# EAGLE board SparkFun_ZED-F9R_v11-Panel (EAGLE 9.6.2), part 1 of 2
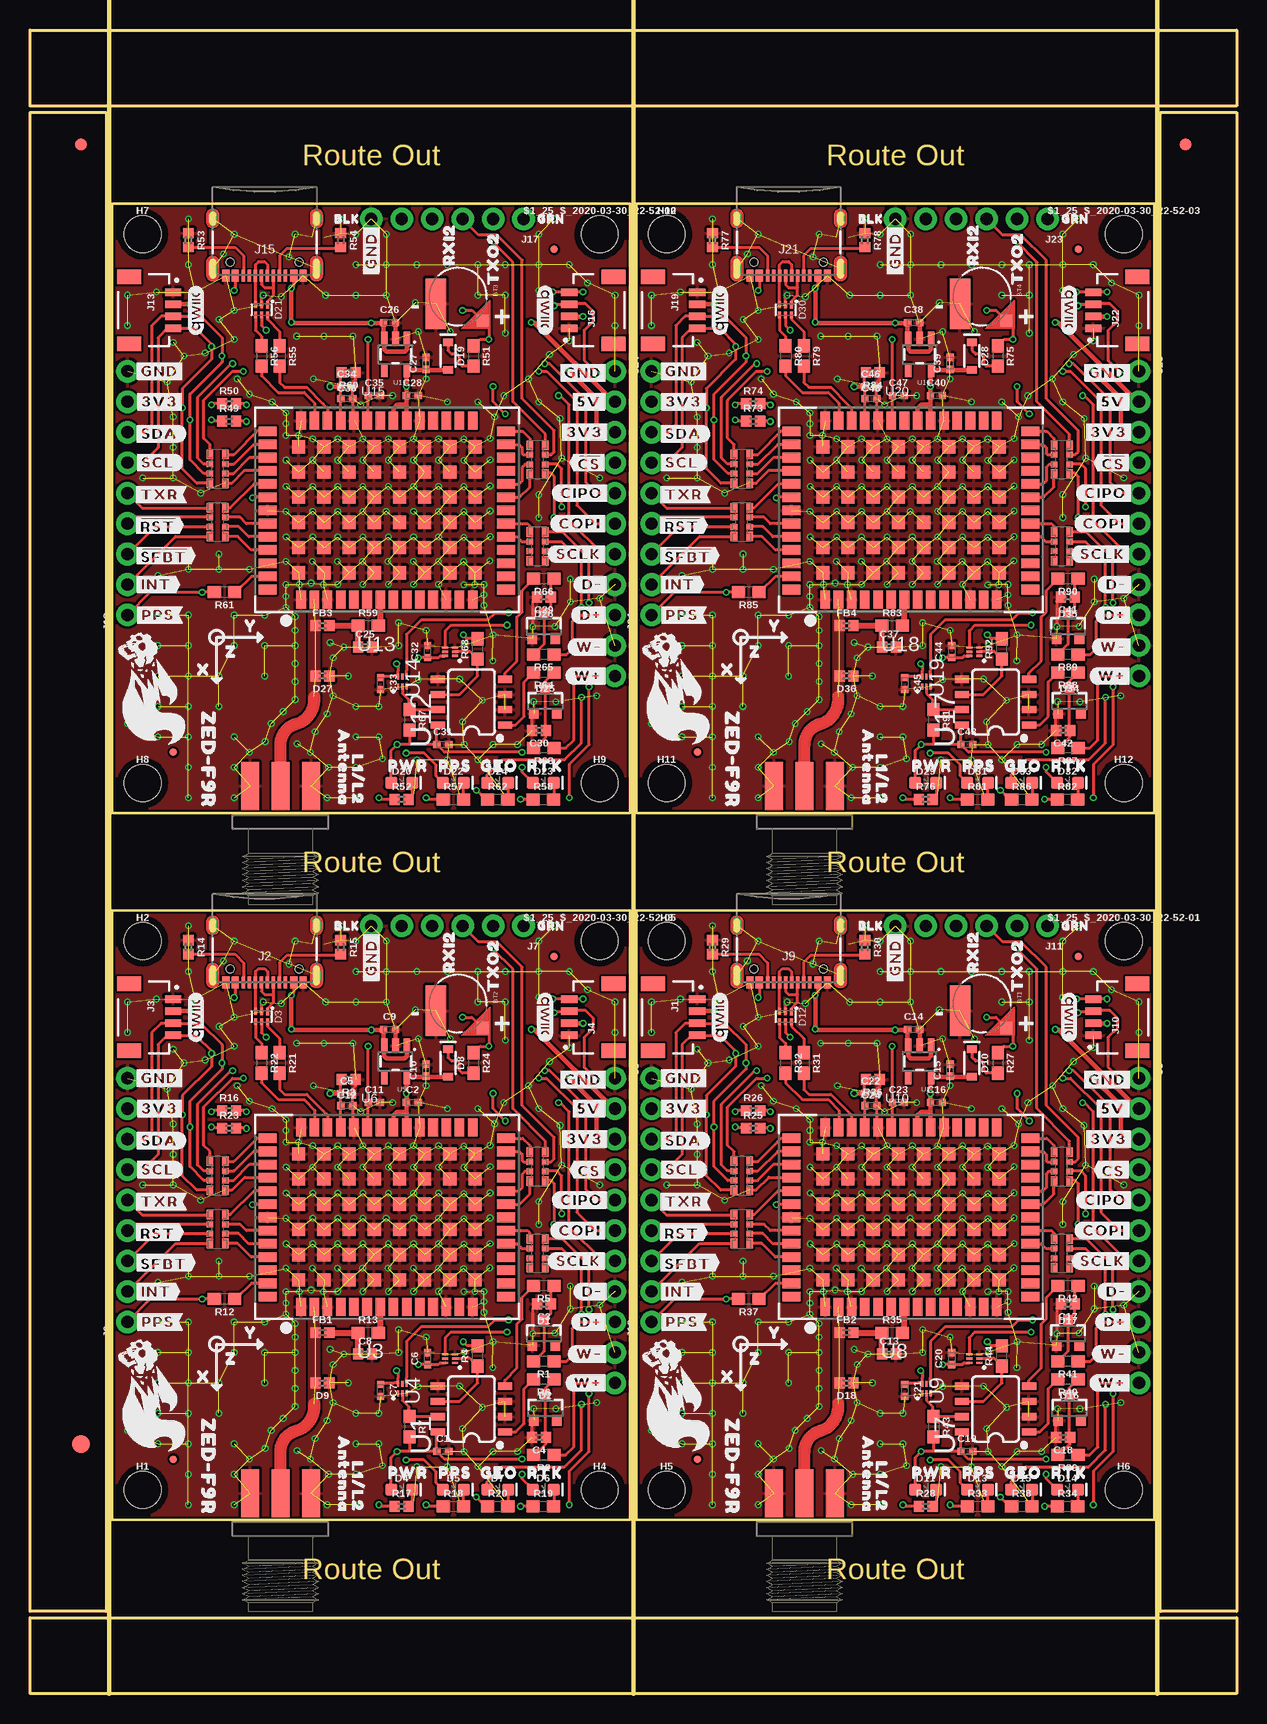
[diagram p0: board, top side]
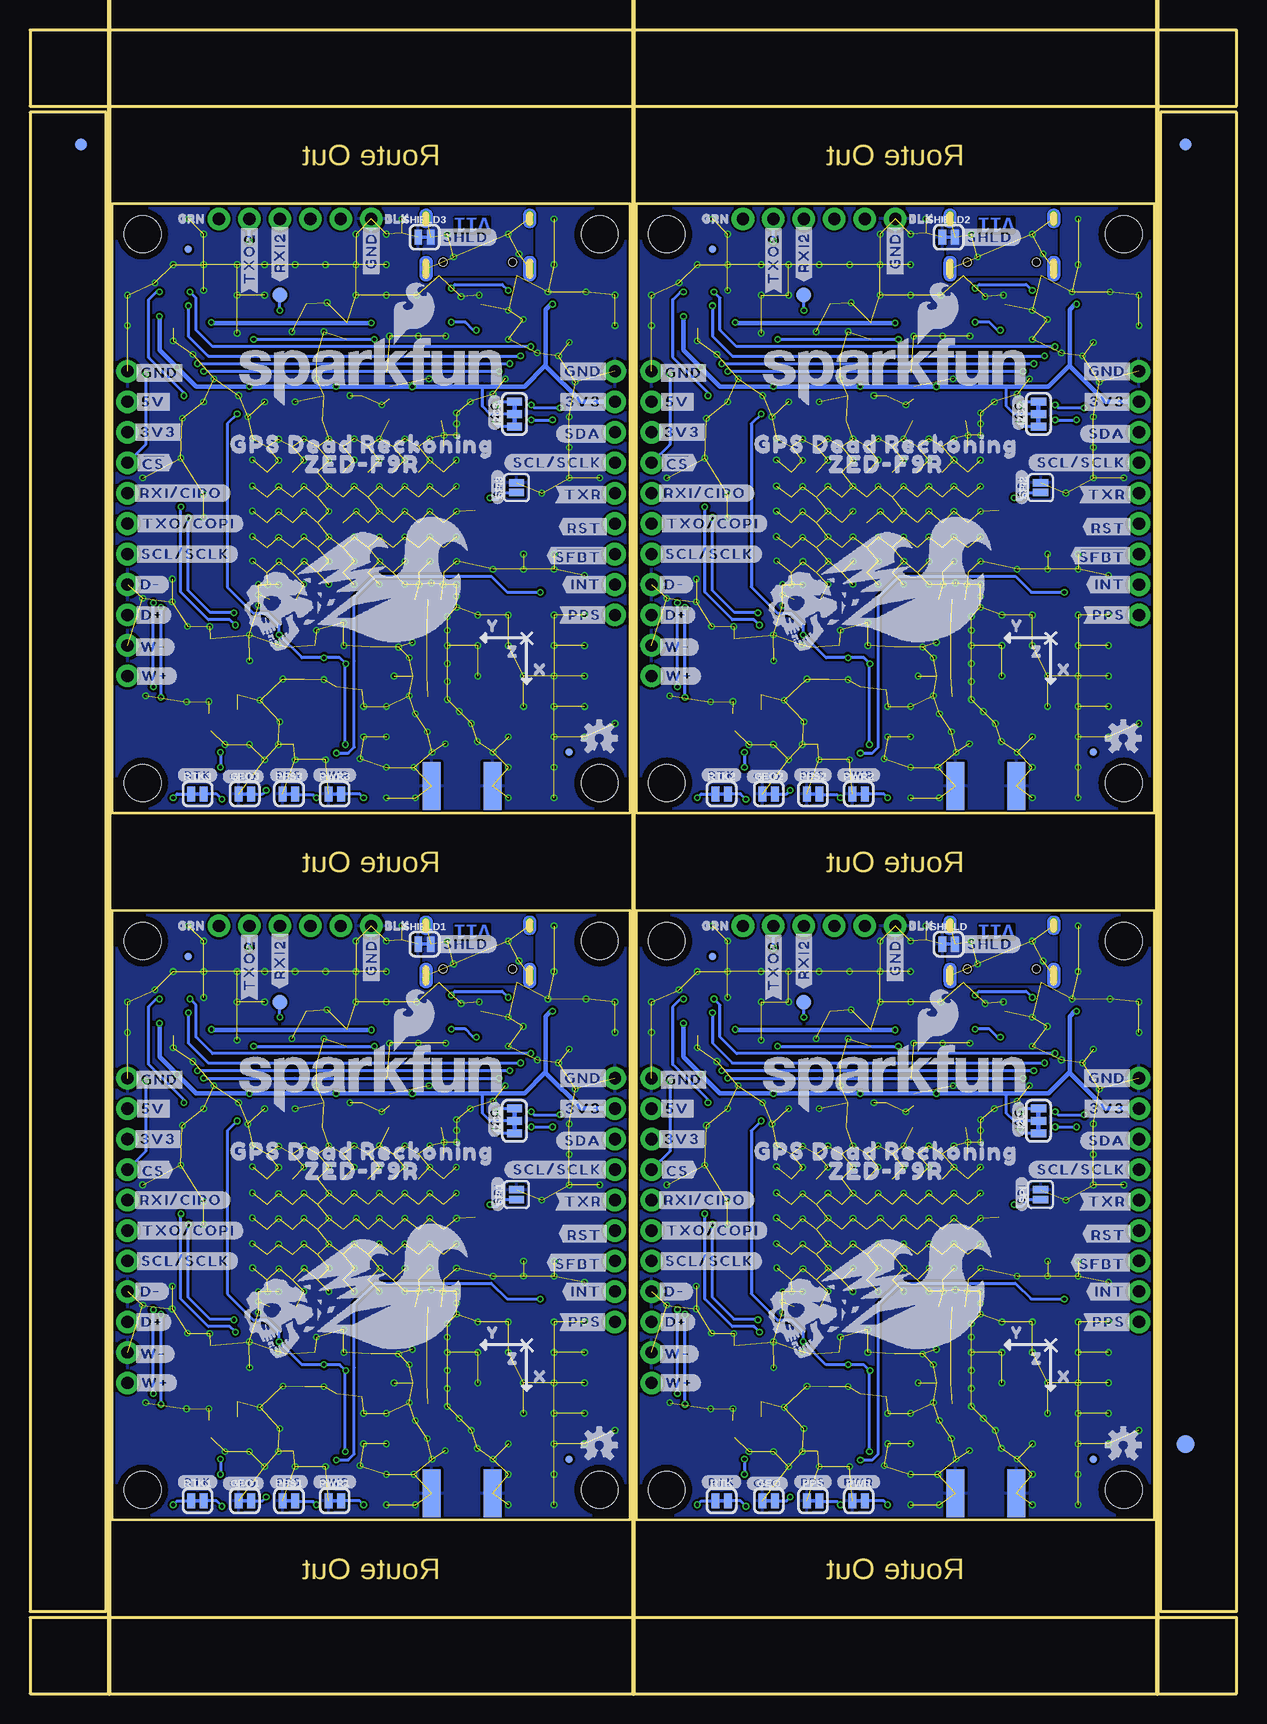
[diagram p1: board, bottom side, seen from below]

Size 100.58 x 138.68 mm. Coordinates in mm from the lower left corner, seen from the top.
Outline: 6.86,14.48 6.86,65.28 50.04,65.28 50.04,14.48 6.86,14.48
Outline: 50.55,14.48 50.55,65.28 93.73,65.28 93.73,14.48 50.55,14.48
Outline: 6.86,73.41 6.86,124.21 50.04,124.21 50.04,73.41 6.86,73.41
Outline: 50.55,73.41 50.55,124.21 93.73,124.21 93.73,73.41 50.55,73.41
Outline: 0,6.35 100.58,6.35 100.58,0 0,0 0,6.35
Outline: 94.23,131.83 100.58,131.83 100.58,6.86 94.23,6.86 94.23,131.83
Outline: 0,138.68 100.58,138.68 100.58,132.33 0,132.33 0,138.68
Outline: 0,131.83 6.35,131.83 6.35,6.86 0,6.86 0,131.83
Copper layers (1*16): Top 0.035mm / dielectric 1.5mm / Bottom 0.035mm
Design rules "SparkFun_ZED-F9R_v11": minimum track width 5mil, minimum drill 0.3mm, track to track 5mil, track to pad 5mil, pad to pad 5mil, via to via 5mil, smd to smd 5mil, copper to edge 7mil, drill to drill 7mil, minimum pad ring 5mil, minimum via ring 5mil, stop-mask expansion 2.5mil, vias tented up to drill 25mil, thermal gap 10mil
Net classes: 1 Antenna: width 1 mm, clearance 0.3 mm
Milling: 3 lines

## Footprints (pad centres in the part's own frame; a part is rotated, then mirrored left to right if it is on the bottom)
STAND-OFF-TIGHT = hole 3.048: 0,0
MS421R_IV03E = smd 1 x 1: + 2.022,2.032 | smd 4.2 x 1.7: - 0.6,-1.85
0402-TIGHT = smd 0.6 x 0.6: 1 -0.5,0; 2 0.5,0
0402 = smd 0.85 x 0.9: 1 -0.58,0; 2 0.58,0
SOT23-3 = smd 0.8 x 0.9: 1 -0.95,-1; 2 0.95,-1; 3 0,1.1
SOT886 = smd 0.61 x 0.25: 1 -0.405,0.5 | smd 0.56 x 0.25: 2 -0.43,0; 3 -0.43,-0.5; 4 0.43,-0.5; 5 0.43,0; 6 0.43,0.5
LED-0603 = smd 1 x 1: A -0.877,0; C 0.877,0
SOD-323 = smd 0.63 x 0.83: A 1.15,0; C -1.15,0
SMA-EDGE = smd 1.5 x 4: GND@0 -2.54,0; GND@1 2.54,0; SIG 0,0 | smd 1.5 x 4 bottom: GND@2 -2.54,0; GND@3 2.54,0
FIDUCIAL-1X2 = smd 1 x 1: 1 0,0
FIDUCIAL-1.5X3 = smd 1.5 x 1.5: 1 0,0
FIDUCIAL-MICRO = smd 0.635 x 0.635: 1 0,0
SMT-JUMPER_2_NC_TRACE_SILK = smd 0.66 x 1.27: 1 -0.521,0; 2 0.521,0
SMT-JUMPER_3_2-NC_TRACE_SILK = smd 0.66 x 1.27: 1 -1.041,0; 2 0,0; 3 1.041,0
JST04_1MM_RA = smd 0.6 x 1.35: 1 -1.5,0; 2 -0.5,0; 3 0.5,0; 4 1.5,0 | smd 1.2 x 2: NC1 2.8,-3.675; NC2 -2.8,-3.675
USB-C-16P-2LAYER-PADS = smd 0.3 x 1: A5 -1.25,-0.34; A6 -0.25,-0.34; A7 0.25,-0.34; A8 1.25,-0.34; B5 1.75,-0.34; B6 0.75,-0.34; B7 -0.75,-0.34; B8 -1.75,-0.34 | smd 0.6 x 1: GND -3.225,-0.34; GND2 3.225,-0.34; VBUS1 -2.45,-0.34; VBUS2 2.45,-0.34 | drill 0.4 pad 0.6 long: SHLD1 -4.318,-0.915; SHLD2 4.318,-0.915; SHLD3 -4.318,-5.095; SHLD4 4.318,-5.095 | hole 0.65: -2.89,-1.445; 2.89,-1.445
1X11_NO_SILK = drill 1.016 pad 1.88: 1 0,0; 2 2.54,0; 3 5.08,0; 4 7.62,0; 5 10.16,0; 6 12.7,0; 7 15.24,0; 8 17.78,0; 9 20.32,0; 10 22.86,0; 11 25.4,0
1X09_NO_SILK = drill 1.016 pad 1.88: 1 0,0; 2 2.54,0; 3 5.08,0; 4 7.62,0; 5 10.16,0; 6 12.7,0; 7 15.24,0; 8 17.78,0; 9 20.32,0
1X06_NO_SILK = drill 1.016 pad 1.88: 1 0,0; 2 2.54,0; 3 5.08,0; 4 7.62,0; 5 10.16,0; 6 12.7,0
0603 = smd 1.1 x 1: 1 -0.85,0; 2 0.85,0
1206_RA = smd 0.8 x 0.55: P1 -1.2,-0.62; P4 1.2,-0.62; P5 1.2,0.68; P8 -1.2,0.68 | smd 0.5 x 0.55: P2 -0.4,-0.62; P3 0.4,-0.62; P6 0.4,0.68; P7 -0.4,0.68
SMT-JUMPER_2_NO_SILK = smd 0.635 x 1.27: 1 -0.406,0; 2 0.406,0
PAD.03X.05 = smd 1.27 x 1.27: 1 0,0
SO08 = smd 0.6 x 1.2: 1 -1.905,-2.8; 2 -0.635,-2.8; 3 0.635,-2.8; 4 1.905,-2.8; 5 1.905,2.8; 6 0.635,2.8; 7 -0.635,2.8; 8 -1.905,2.8
SOT23-5 = smd 0.55 x 1.2: 1 -0.95,-1.3; 2 0,-1.3; 3 0.95,-1.3; 4 0.95,1.3; 5 -0.95,1.3
SIP6_MICROPAK2 = smd 0.19 x 0.5: P1 -0.36,-0.4; P2 -0.01,-0.4; P3 0.34,-0.4; P4 0.34,0.43; P5 -0.01,0.43; P6 -0.36,0.43
UBLOX_ZED_F9R = smd 1.1 x 1.1: G1 -7.312,-5.37; G2 -5.212,-5.37; G3 -3.112,-5.37; G4 -1.012,-5.37; G5 1.088,-5.37; G6 3.188,-5.37; G7 5.288,-5.37; G8 7.388,-5.37; G9 7.388,-3.27; G10 5.288,-3.27; G11 3.188,-3.27; G12 1.088,-3.27; G13 -1.012,-3.27; G14 -3.112,-3.27; G15 -5.212,-3.27; G16 -7.312,-3.27; G17 -7.312,-1.17; G18 -5.212,-1.17; G19 -3.112,-1.17; G20 -1.012,-1.17; G21 1.088,-1.17; G22 3.188,-1.17; G23 5.288,-1.17; G24 7.388,-1.17; G25 7.388,0.93; G26 5.288,0.93; G27 3.188,0.93; G28 1.088,0.93; G29 -1.012,0.93; G30 -3.112,0.93; G31 -5.212,0.93; G32 -7.312,0.93; G33 -7.312,3.03; G34 -5.212,3.03; G35 -3.112,3.03; G36 -1.012,3.03; G37 1.088,3.03; G38 3.188,3.03; G39 5.288,3.03; G40 7.388,3.03; G41 7.388,5.13; G42 5.288,5.13; G43 3.188,5.13; G44 1.088,5.13; G45 -1.012,5.13; G46 -3.112,5.13; G47 -5.212,5.13; G48 -7.312,5.13 | smd 0.8 x 1.5: P1 -7.112,-7.62; P2 -6.012,-7.62; P3 -4.912,-7.62; P4 -3.812,-7.62; P5 -2.712,-7.62; P6 -1.612,-7.62; P7 -0.512,-7.62; P8 0.588,-7.62; P9 1.688,-7.62; P10 2.788,-7.62; P11 3.888,-7.62; P12 4.988,-7.62; P13 6.088,-7.62; P14 7.188,-7.62; P28 7.188,7.33; P29 6.088,7.33; P30 4.988,7.33; P31 3.888,7.33; P32 2.788,7.33; P33 1.688,7.33; P34 0.588,7.33; P35 -0.512,7.33; P36 -1.612,7.33; P37 -2.712,7.33; P38 -3.812,7.33; P39 -4.912,7.33; P40 -6.012,7.33; P41 -7.112,7.33 | smd 1.5 x 0.8: P15 9.988,-6.77; P16 9.988,-5.67; P17 9.988,-4.57; P18 9.988,-3.47; P19 9.988,-2.37; P20 9.988,-1.27; P21 9.988,-0.17; P22 9.988,0.93; P23 9.988,2.03; P24 9.988,3.13; P25 9.988,4.23; P26 9.988,5.33; P27 9.988,6.43; P42 -9.912,6.43; P43 -9.912,5.33; P44 -9.912,4.23; P45 -9.912,3.13; P46 -9.912,2.03; P47 -9.912,0.93; P48 -9.912,-0.17; P49 -9.912,-1.27; P50 -9.912,-2.37; P51 -9.912,-3.47; P52 -9.912,-4.57; P53 -9.912,-5.67; P54 -9.912,-6.77

## Placement (x,y rotation side)
$1_25_$_2020-03-30_22-52-01  STAND-OFFTIGHT  [STAND-OFF-TIGHT]  91.19,62.74 0 top
$1_25_$_2020-03-30_22-52-02  STAND-OFFTIGHT  [STAND-OFF-TIGHT]  47.5,121.67 0 top
$1_25_$_2020-03-30_22-52-03  STAND-OFFTIGHT  [STAND-OFF-TIGHT]  91.19,121.67 0 top
$1_25_$_2020-03-30_22-52-05  STAND-OFFTIGHT  [STAND-OFF-TIGHT]  47.5,62.74 0 top
BT1  RELOWABLE_BATTERY_MS421R  [MS421R_IV03E]  79.38,57.53 270 top
BT2  RELOWABLE_BATTERY_MS421R  [MS421R_IV03E]  35.69,57.53 270 top
BT3  RELOWABLE_BATTERY_MS421R  [MS421R_IV03E]  35.69,116.46 270 top
BT4  RELOWABLE_BATTERY_MS421R  [MS421R_IV03E]  79.38,116.46 270 top
C1  0.1uF  [0402-TIGHT]  34.42,20.19 0 top
C2  1.0uF  [0402-TIGHT]  31.88,49.28 0 top
C3  1nF  [0402]  42.84,32.49 180 top
C4  1nF  [0402]  42.43,21.37 180 top
C5  0.1uF  [0402-TIGHT]  26.39,50.01 0 top
C6  0.1uF  [0402-TIGHT]  33.15,27.94 90 top
C7  0.1uF  [0402-TIGHT]  29.24,25.28 270 top
C8  47pF  [0402]  27.94,28.32 0 top
C9  1.0uF  [0402-TIGHT]  29.97,55.37 0 top
C10  1.0uF  [0402-TIGHT]  33.02,51.97 90 top
C11  2.2uF  [0402-TIGHT]  28.7,49.28 0 top
C12  0.1uF  [0402-TIGHT]  26.42,49.02 0 top
C13  47pF  [0402]  71.63,28.32 0 top
C14  1.0uF  [0402-TIGHT]  73.66,55.37 0 top
C15  1.0uF  [0402-TIGHT]  76.71,51.97 90 top
C16  1.0uF  [0402-TIGHT]  75.56,49.28 0 top
C17  1nF  [0402]  86.53,32.49 180 top
C18  1nF  [0402]  86.12,21.37 180 top
C19  0.1uF  [0402-TIGHT]  78.11,20.19 0 top
C20  0.1uF  [0402-TIGHT]  76.84,27.94 90 top
C21  0.1uF  [0402-TIGHT]  72.92,25.28 270 top
C22  0.1uF  [0402-TIGHT]  70.08,50.01 0 top
C23  2.2uF  [0402-TIGHT]  72.39,49.28 0 top
C24  0.1uF  [0402-TIGHT]  70.1,49.02 0 top
C25  47pF  [0402]  27.94,87.25 0 top
C26  1.0uF  [0402-TIGHT]  29.97,114.3 0 top
C27  1.0uF  [0402-TIGHT]  33.02,110.9 90 top
C28  1.0uF  [0402-TIGHT]  31.88,108.2 0 top
C29  1nF  [0402]  42.84,91.42 180 top
C30  1nF  [0402]  42.43,80.3 180 top
C31  0.1uF  [0402-TIGHT]  34.42,79.12 0 top
C32  0.1uF  [0402-TIGHT]  33.15,86.87 90 top
C33  0.1uF  [0402-TIGHT]  29.24,84.21 270 top
C34  0.1uF  [0402-TIGHT]  26.39,108.94 0 top
C35  2.2uF  [0402-TIGHT]  28.7,108.2 0 top
C36  0.1uF  [0402-TIGHT]  26.42,107.95 0 top
C37  47pF  [0402]  71.63,87.25 0 top
C38  1.0uF  [0402-TIGHT]  73.66,114.3 0 top
C39  1.0uF  [0402-TIGHT]  76.71,110.9 90 top
C40  1.0uF  [0402-TIGHT]  75.56,108.2 0 top
C41  1nF  [0402]  86.53,91.42 180 top
C42  1nF  [0402]  86.12,80.3 180 top
C43  0.1uF  [0402-TIGHT]  78.11,79.12 0 top
C44  0.1uF  [0402-TIGHT]  76.84,86.87 90 top
C45  0.1uF  [0402-TIGHT]  72.92,84.21 270 top
C46  0.1uF  [0402-TIGHT]  70.08,108.94 0 top
C47  2.2uF  [0402-TIGHT]  72.39,108.2 0 top
C48  0.1uF  [0402-TIGHT]  70.1,107.95 0 top
D1  15V  [SOT23-3]  42.84,30.02 0 top
D2  15V  [SOT23-3]  42.97,23.79 0 top
D3  PRTR5V0U2F  [SOT886]  19.3,56.44 270 top
D4  RED  [LED-0603]  30.99,17.02 0 top
D5  BLUE  [LED-0603]  35.31,17.02 0 top
D6  BLUE  [LED-0603]  42.8,17.02 0 top
D7  BLUE  [LED-0603]  38.99,17.02 0 top
D8  0.5A/40V/420mV  [SOD-323]  34.85,52.58 270 top
D9  PESD0402-0402  [0402]  24.38,25.91 180 top
D10  0.5A/40V/420mV  [SOD-323]  78.54,52.58 270 top
D11  RED  [LED-0603]  74.68,17.02 0 top
D12  PRTR5V0U2F  [SOT886]  62.99,56.44 270 top
D13  BLUE  [LED-0603]  78.99,17.02 0 top
D14  BLUE  [LED-0603]  86.49,17.02 0 top
D15  BLUE  [LED-0603]  82.68,17.02 0 top
D16  15V  [SOT23-3]  86.65,23.79 0 top
D17  15V  [SOT23-3]  86.53,30.02 0 top
D18  PESD0402-0402  [0402]  68.07,25.91 180 top
D19  0.5A/40V/420mV  [SOD-323]  34.85,111.51 270 top
D20  RED  [LED-0603]  30.99,75.95 0 top
D21  PRTR5V0U2F  [SOT886]  19.3,115.37 270 top
D22  BLUE  [LED-0603]  35.31,75.95 0 top
D23  BLUE  [LED-0603]  42.8,75.95 0 top
D24  BLUE  [LED-0603]  38.99,75.95 0 top
D25  15V  [SOT23-3]  42.97,82.72 0 top
D26  15V  [SOT23-3]  42.84,88.95 0 top
D27  PESD0402-0402  [0402]  24.38,84.84 180 top
D28  0.5A/40V/420mV  [SOD-323]  78.54,111.51 270 top
D29  RED  [LED-0603]  74.68,75.95 0 top
D30  PRTR5V0U2F  [SOT886]  62.99,115.37 270 top
D31  BLUE  [LED-0603]  78.99,75.95 0 top
D32  BLUE  [LED-0603]  86.49,75.95 0 top
D33  BLUE  [LED-0603]  82.68,75.95 0 top
D34  15V  [SOT23-3]  86.65,82.72 0 top
D35  15V  [SOT23-3]  86.53,88.95 0 top
D36  PESD0402-0402  [0402]  68.07,84.84 180 top
E1  ANTENNA-SMA-GROUNDEDEDGE_SMA  [SMA-EDGE]  20.88,16.72 180 top
E2  ANTENNA-SMA-GROUNDEDEDGE_SMA  [SMA-EDGE]  64.57,16.72 180 top
E3  ANTENNA-SMA-GROUNDEDEDGE_SMA  [SMA-EDGE]  20.88,75.65 180 top
E4  ANTENNA-SMA-GROUNDEDEDGE_SMA  [SMA-EDGE]  64.57,75.65 180 top
E$1  [FIDUCIAL-1X2]  4.23,129.16 0 top
E$2  [FIDUCIAL-1X2]  4.23,129.16 0 bottom
E$3  [FIDUCIAL-1X2]  96.35,129.16 0 top
E$4  [FIDUCIAL-1X2]  96.35,129.16 0 bottom
E$5  [FIDUCIAL-1.5X3]  4.23,20.83 0 top
E$6  [FIDUCIAL-1.5X3]  4.23,20.83 0 bottom
FB1  120Ω  [0402]  24.38,30.1 0 top
FB2  120Ω  [0402]  68.07,30.1 0 top
FB3  120Ω  [0402]  24.38,89.03 0 top
FB4  120Ω  [0402]  68.07,89.03 0 top
FD1  FIDUCIALUFIDUCIAL  [FIDUCIAL-MICRO]  11.94,19.56 0 top
FD2  FIDUCIALUFIDUCIAL  [FIDUCIAL-MICRO]  11.94,19.56 0 bottom
FD3  FIDUCIALUFIDUCIAL  [FIDUCIAL-MICRO]  43.69,61.47 0 top
FD4  FIDUCIALUFIDUCIAL  [FIDUCIAL-MICRO]  43.69,61.47 0 bottom
FD5  FIDUCIALUFIDUCIAL  [FIDUCIAL-MICRO]  87.38,61.47 0 top
FD6  FIDUCIALUFIDUCIAL  [FIDUCIAL-MICRO]  55.63,19.56 0 bottom
FD7  FIDUCIALUFIDUCIAL  [FIDUCIAL-MICRO]  87.38,61.47 0 bottom
FD8  FIDUCIALUFIDUCIAL  [FIDUCIAL-MICRO]  55.63,19.56 0 top
FD9  FIDUCIALUFIDUCIAL  [FIDUCIAL-MICRO]  43.69,120.4 0 top
FD10  FIDUCIALUFIDUCIAL  [FIDUCIAL-MICRO]  11.94,78.49 0 bottom
FD11  FIDUCIALUFIDUCIAL  [FIDUCIAL-MICRO]  43.69,120.4 0 bottom
FD12  FIDUCIALUFIDUCIAL  [FIDUCIAL-MICRO]  11.94,78.49 0 top
FD13  FIDUCIALUFIDUCIAL  [FIDUCIAL-MICRO]  87.38,120.4 0 top
FD14  FIDUCIALUFIDUCIAL  [FIDUCIAL-MICRO]  55.63,78.49 0 bottom
FD15  FIDUCIALUFIDUCIAL  [FIDUCIAL-MICRO]  87.38,120.4 0 bottom
FD16  FIDUCIALUFIDUCIAL  [FIDUCIAL-MICRO]  55.63,78.49 0 top
GEO  JUMPER-SMT_2_NC_TRACE_SILK  [SMT-JUMPER_2_NC_TRACE_SILK]  38.99,16.08 0 bottom
GEO1  JUMPER-SMT_2_NC_TRACE_SILK  [SMT-JUMPER_2_NC_TRACE_SILK]  82.68,16.08 0 bottom
GEO2  JUMPER-SMT_2_NC_TRACE_SILK  [SMT-JUMPER_2_NC_TRACE_SILK]  38.99,75.01 0 bottom
GEO3  JUMPER-SMT_2_NC_TRACE_SILK  [SMT-JUMPER_2_NC_TRACE_SILK]  82.68,75.01 0 bottom
H1  STAND-OFFTIGHT  [STAND-OFF-TIGHT]  9.4,16.99 0 top
H2  STAND-OFFTIGHT  [STAND-OFF-TIGHT]  9.4,62.74 0 top
H3  STAND-OFFTIGHT  [STAND-OFF-TIGHT]  53.09,62.74 0 top
H4  STAND-OFFTIGHT  [STAND-OFF-TIGHT]  47.5,16.99 0 top
H5  STAND-OFFTIGHT  [STAND-OFF-TIGHT]  53.09,16.99 0 top
H6  STAND-OFFTIGHT  [STAND-OFF-TIGHT]  91.19,16.99 0 top
H7  STAND-OFFTIGHT  [STAND-OFF-TIGHT]  9.4,121.67 0 top
H8  STAND-OFFTIGHT  [STAND-OFF-TIGHT]  9.4,75.92 0 top
H9  STAND-OFFTIGHT  [STAND-OFF-TIGHT]  47.5,75.92 0 top
H10  STAND-OFFTIGHT  [STAND-OFF-TIGHT]  53.09,121.67 0 top
H11  STAND-OFFTIGHT  [STAND-OFF-TIGHT]  53.09,75.92 0 top
H12  STAND-OFFTIGHT  [STAND-OFF-TIGHT]  91.19,75.92 0 top
I2C  JUMPER-SMT_3_2-NC_TRACE_SILK  [SMT-JUMPER_3_2-NC_TRACE_SILK]  16.51,47.75 90 bottom
I2C1  JUMPER-SMT_3_2-NC_TRACE_SILK  [SMT-JUMPER_3_2-NC_TRACE_SILK]  60.2,47.75 90 bottom
I2C2  JUMPER-SMT_3_2-NC_TRACE_SILK  [SMT-JUMPER_3_2-NC_TRACE_SILK]  16.51,106.68 90 bottom
I2C3  JUMPER-SMT_3_2-NC_TRACE_SILK  [SMT-JUMPER_3_2-NC_TRACE_SILK]  60.2,106.68 90 bottom
J1  QWIIC_RIGHT_ANGLE  [JST04_1MM_RA]  55.63,56.39 270 top
J2  [USB-C-16P-2LAYER-PADS]  19.56,58.95 180 top
J3  QWIIC_RIGHT_ANGLE  [JST04_1MM_RA]  11.94,56.39 270 top
J4  QWIIC_RIGHT_ANGLE  [JST04_1MM_RA]  44.96,56.39 90 top
J5  [1X11_NO_SILK]  48.77,51.31 270 top
J6  [1X09_NO_SILK]  8.13,30.99 90 top
J7  [1X06_NO_SILK]  41.15,64.01 180 top
J8  [1X11_NO_SILK]  92.46,51.31 270 top
J9  [USB-C-16P-2LAYER-PADS]  63.25,58.95 180 top
J10  QWIIC_RIGHT_ANGLE  [JST04_1MM_RA]  88.65,56.39 90 top
J11  [1X06_NO_SILK]  84.84,64.01 180 top
J12  [1X09_NO_SILK]  51.82,30.99 90 top
J13  QWIIC_RIGHT_ANGLE  [JST04_1MM_RA]  11.94,115.32 270 top
J14  [1X11_NO_SILK]  48.77,110.24 270 top
J15  [USB-C-16P-2LAYER-PADS]  19.56,117.88 180 top
J16  QWIIC_RIGHT_ANGLE  [JST04_1MM_RA]  44.96,115.32 90 top
J17  [1X06_NO_SILK]  41.15,122.94 180 top
J18  [1X09_NO_SILK]  8.13,89.92 90 top
J19  QWIIC_RIGHT_ANGLE  [JST04_1MM_RA]  55.63,115.32 270 top
J20  [1X11_NO_SILK]  92.46,110.24 270 top
J21  [USB-C-16P-2LAYER-PADS]  63.25,117.88 180 top
J22  QWIIC_RIGHT_ANGLE  [JST04_1MM_RA]  88.65,115.32 90 top
J23  [1X06_NO_SILK]  84.84,122.94 180 top
J24  [1X09_NO_SILK]  51.82,89.92 90 top
LOGO1  OSHW-LOGOS  [OSHW-LOGO-S]  9.44,20.72 0 bottom
LOGO2  QWIIC_LOGO_4MM  [QWIIC_4MM]  42.93,56.39 270 top
LOGO3  SFE_LOGO_NAME_FLAME.2_INCH  [SFE_LOGO_NAME_FLAME_.2]  28.45,51.31 0 bottom
LOGO4  QWIIC_LOGO_4MM  [QWIIC_4MM]  13.84,56.39 90 top
LOGO5  SFE_LOGO_NAME_FLAME.2_INCH  [SFE_LOGO_NAME_FLAME_.2]  72.14,51.31 0 bottom
LOGO6  QWIIC_LOGO_4MM  [QWIIC_4MM]  86.61,56.39 270 top
LOGO7  OSHW-LOGOS  [OSHW-LOGO-S]  53.13,20.72 0 bottom
LOGO8  QWIIC_LOGO_4MM  [QWIIC_4MM]  57.53,56.39 90 top
LOGO9  SFE_LOGO_NAME_FLAME.2_INCH  [SFE_LOGO_NAME_FLAME_.2]  28.45,110.24 0 bottom
LOGO10  QWIIC_LOGO_4MM  [QWIIC_4MM]  42.93,115.32 270 top
LOGO11  OSHW-LOGOS  [OSHW-LOGO-S]  9.44,79.65 0 bottom
LOGO12  QWIIC_LOGO_4MM  [QWIIC_4MM]  13.84,115.32 90 top
LOGO13  SFE_LOGO_NAME_FLAME.2_INCH  [SFE_LOGO_NAME_FLAME_.2]  72.14,110.24 0 bottom
LOGO14  QWIIC_LOGO_4MM  [QWIIC_4MM]  86.61,115.32 270 top
LOGO15  OSHW-LOGOS  [OSHW-LOGO-S]  53.13,79.65 0 bottom
LOGO16  QWIIC_LOGO_4MM  [QWIIC_4MM]  57.53,115.32 90 top
PPS  JUMPER-SMT_2_NC_TRACE_SILK  [SMT-JUMPER_2_NC_TRACE_SILK]  35.31,16.08 0 bottom
PPS1  JUMPER-SMT_2_NC_TRACE_SILK  [SMT-JUMPER_2_NC_TRACE_SILK]  78.99,16.08 0 bottom
PPS2  JUMPER-SMT_2_NC_TRACE_SILK  [SMT-JUMPER_2_NC_TRACE_SILK]  35.31,75.01 0 bottom
PPS3  JUMPER-SMT_2_NC_TRACE_SILK  [SMT-JUMPER_2_NC_TRACE_SILK]  78.99,75.01 0 bottom
PWR  JUMPER-SMT_2_NC_TRACE_SILK  [SMT-JUMPER_2_NC_TRACE_SILK]  31.5,16.08 0 bottom
PWR1  JUMPER-SMT_2_NC_TRACE_SILK  [SMT-JUMPER_2_NC_TRACE_SILK]  75.18,16.08 0 bottom
PWR2  JUMPER-SMT_2_NC_TRACE_SILK  [SMT-JUMPER_2_NC_TRACE_SILK]  31.5,75.01 0 bottom
PWR3  JUMPER-SMT_2_NC_TRACE_SILK  [SMT-JUMPER_2_NC_TRACE_SILK]  75.18,75.01 0 bottom
R1  3.3k  [0603]  42.84,27.71 180 top
R2  3.3k  [0603]  42.84,19.9 180 top
R3  100K  [0402]  26.57,51.21 180 top
R4  910  [0603]  37.33,28.16 90 top
R5  470  [0603]  42.84,34.01 180 top
R6  470  [0603]  42.84,26.21 180 top
R7  910  [0603]  31.64,22.26 270 top
R8  33  [1206_RA]  15.62,38.73 270 top
R9  33  [1206_RA]  15.62,43.18 270 top
R10  33  [1206_RA]  42.29,43.94 270 top
R11  33  [1206_RA]  42.29,36.7 270 top
R12  33  [0603]  16.22,32.89 180 top
R13  33  [0603]  28.19,30.1 0 top
R14  5.1k  [0402]  13.21,62.23 270 top
R15  5.1k  [0402]  25.91,62.23 270 top
R16  2.2K  [0402]  16.61,48.61 0 top
R17  1KOHM-0402-1/16W-1%  [0402]  30.99,15.62 0 top
R18  2.2k  [0603]  35.31,15.62 0 top
R19  2.2k  [0603]  42.8,15.62 0 top
R20  2.2k  [0603]  38.99,15.62 0 top
R21  27  [0603]  20.83,52.58 270 top
R22  27  [0603]  19.3,52.58 270 top
R23  2.2K  [0402]  16.61,47.14 0 top
R24  3.3k  [0603]  36.98,52.58 270 top
R25  2.2K  [0402]  60.29,47.14 0 top
R26  2.2K  [0402]  60.29,48.61 0 top
R27  3.3k  [0603]  80.67,52.58 270 top
R28  1KOHM-0402-1/16W-1%  [0402]  74.68,15.62 0 top
R29  5.1k  [0402]  56.9,62.23 270 top
R30  5.1k  [0402]  69.6,62.23 270 top
R31  27  [0603]  64.52,52.58 270 top
R32  27  [0603]  62.99,52.58 270 top
R33  2.2k  [0603]  78.99,15.62 0 top
R34  2.2k  [0603]  86.49,15.62 0 top
R35  33  [0603]  71.88,30.1 0 top
R36  100K  [0402]  70.26,51.21 180 top
R37  33  [0603]  59.91,32.89 180 top
R38  2.2k  [0603]  82.68,15.62 0 top
R39  3.3k  [0603]  86.53,19.9 180 top
R40  470  [0603]  86.53,26.21 180 top
R41  3.3k  [0603]  86.53,27.71 180 top
R42  470  [0603]  86.53,34.01 180 top
R43  910  [0603]  75.33,22.26 270 top
R44  910  [0603]  81.02,28.16 90 top
R45  33  [1206_RA]  59.31,43.18 270 top
R46  33  [1206_RA]  59.31,38.73 270 top
R47  33  [1206_RA]  85.98,43.94 270 top
R48  33  [1206_RA]  85.98,36.7 270 top
R49  2.2K  [0402]  16.61,106.07 0 top
R50  2.2K  [0402]  16.61,107.53 0 top
R51  3.3k  [0603]  36.98,111.51 270 top
R52  1KOHM-0402-1/16W-1%  [0402]  30.99,74.55 0 top
R53  5.1k  [0402]  13.21,121.16 270 top
R54  5.1k  [0402]  25.91,121.16 270 top
R55  27  [0603]  20.83,111.51 270 top
R56  27  [0603]  19.3,111.51 270 top
R57  2.2k  [0603]  35.31,74.55 0 top
R58  2.2k  [0603]  42.8,74.55 0 top
R59  33  [0603]  28.19,89.03 0 top
R60  100K  [0402]  26.57,110.13 180 top
R61  33  [0603]  16.22,91.82 180 top
R62  2.2k  [0603]  38.99,74.55 0 top
R63  3.3k  [0603]  42.84,78.83 180 top
R64  470  [0603]  42.84,85.13 180 top
R65  3.3k  [0603]  42.84,86.64 180 top
R66  470  [0603]  42.84,92.94 180 top
R67  910  [0603]  31.64,81.19 270 top
R68  910  [0603]  37.33,87.09 90 top
R69  33  [1206_RA]  15.62,102.11 270 top
R70  33  [1206_RA]  15.62,97.66 270 top
R71  33  [1206_RA]  42.29,102.87 270 top
R72  33  [1206_RA]  42.29,95.63 270 top
R73  2.2K  [0402]  60.29,106.07 0 top
R74  2.2K  [0402]  60.29,107.53 0 top
R75  3.3k  [0603]  80.67,111.51 270 top
R76  1KOHM-0402-1/16W-1%  [0402]  74.68,74.55 0 top
R77  5.1k  [0402]  56.9,121.16 270 top
R78  5.1k  [0402]  69.6,121.16 270 top
R79  27  [0603]  64.52,111.51 270 top
R80  27  [0603]  62.99,111.51 270 top
R81  2.2k  [0603]  78.99,74.55 0 top
R82  2.2k  [0603]  86.49,74.55 0 top
R83  33  [0603]  71.88,89.03 0 top
R84  100K  [0402]  70.26,110.13 180 top
R85  33  [0603]  59.91,91.82 180 top
R86  2.2k  [0603]  82.68,74.55 0 top
R87  3.3k  [0603]  86.53,78.83 180 top
R88  470  [0603]  86.53,85.13 180 top
R89  3.3k  [0603]  86.53,86.64 180 top
R90  470  [0603]  86.53,92.94 180 top
R91  910  [0603]  75.33,81.19 270 top
R92  910  [0603]  81.02,87.09 90 top
R93  33  [1206_RA]  59.31,102.11 270 top
R94  33  [1206_RA]  59.31,97.66 270 top
R95  33  [1206_RA]  85.98,102.87 270 top
R96  33  [1206_RA]  85.98,95.63 270 top
RTK  JUMPER-SMT_2_NC_TRACE_SILK  [SMT-JUMPER_2_NC_TRACE_SILK]  42.93,16.08 0 bottom
RTK1  JUMPER-SMT_2_NC_TRACE_SILK  [SMT-JUMPER_2_NC_TRACE_SILK]  86.61,16.08 0 bottom
RTK2  JUMPER-SMT_2_NC_TRACE_SILK  [SMT-JUMPER_2_NC_TRACE_SILK]  42.93,75.01 0 bottom
RTK3  JUMPER-SMT_2_NC_TRACE_SILK  [SMT-JUMPER_2_NC_TRACE_SILK]  86.61,75.01 0 bottom
SHIELD  JUMPER-SMT_2_NC_TRACE_SILK  [SMT-JUMPER_2_NC_TRACE_SILK]  24,62.48 0 bottom
SHIELD1  JUMPER-SMT_2_NC_TRACE_SILK  [SMT-JUMPER_2_NC_TRACE_SILK]  67.69,62.48 0 bottom
SHIELD2  JUMPER-SMT_2_NC_TRACE_SILK  [SMT-JUMPER_2_NC_TRACE_SILK]  24,121.41 0 bottom
SHIELD3  JUMPER-SMT_2_NC_TRACE_SILK  [SMT-JUMPER_2_NC_TRACE_SILK]  67.69,121.41 0 bottom
SPI  JUMPER-SMT_2_NO_SILK  [SMT-JUMPER_2_NO_SILK]  16.33,41.61 90 bottom
SPI1  JUMPER-SMT_2_NO_SILK  [SMT-JUMPER_2_NO_SILK]  60.02,41.61 90 bottom
SPI2  JUMPER-SMT_2_NO_SILK  [SMT-JUMPER_2_NO_SILK]  16.33,100.53 90 bottom
SPI3  JUMPER-SMT_2_NO_SILK  [SMT-JUMPER_2_NO_SILK]  60.02,100.53 90 bottom
TP1  TEST-POINT3X5  [PAD.03X.05]  36.07,57.66 0 bottom
TP2  TEST-POINT3X5  [PAD.03X.05]  79.76,57.66 0 bottom
TP3  TEST-POINT3X5  [PAD.03X.05]  36.07,116.59 0 bottom
TP4  TEST-POINT3X5  [PAD.03X.05]  79.76,116.59 0 bottom
U1  DUAL-OPTO_HCPL-073LSOIC-8  [SO08]  36.8,23.73 90 top
U2  3.3V  [SOT23-5]  74.17,52.7 180 top
U3  UHS_INVERTER_SCHMITT_TRIGGERSIP6  [SIP6_MICROPAK2]  31.05,25.42 0 top
U4  UHS_INVERTER_SCHMITT_TRIGGERSIP6  [SIP6_MICROPAK2]  35.05,27.94 90 top
U5  3.3V  [SOT23-5]  30.48,52.7 180 top
U6  U-BLOX_ZED-F9R  [UBLOX_ZED_F9R]  29.72,39.88 0 top
U7  DUAL-OPTO_HCPL-073LSOIC-8  [SO08]  80.49,23.73 90 top
U8  UHS_INVERTER_SCHMITT_TRIGGERSIP6  [SIP6_MICROPAK2]  74.74,25.42 0 top
U9  UHS_INVERTER_SCHMITT_TRIGGERSIP6  [SIP6_MICROPAK2]  78.74,27.94 90 top
U10  U-BLOX_ZED-F9R  [UBLOX_ZED_F9R]  73.41,39.88 0 top
U11  3.3V  [SOT23-5]  30.48,111.63 180 top
U12  DUAL-OPTO_HCPL-073LSOIC-8  [SO08]  36.8,82.66 90 top
U13  UHS_INVERTER_SCHMITT_TRIGGERSIP6  [SIP6_MICROPAK2]  31.05,84.35 0 top
U14  UHS_INVERTER_SCHMITT_TRIGGERSIP6  [SIP6_MICROPAK2]  35.05,86.87 90 top
U15  U-BLOX_ZED-F9R  [UBLOX_ZED_F9R]  29.72,98.81 0 top
U16  3.3V  [SOT23-5]  74.17,111.63 180 top
U17  DUAL-OPTO_HCPL-073LSOIC-8  [SO08]  80.49,82.66 90 top
U18  UHS_INVERTER_SCHMITT_TRIGGERSIP6  [SIP6_MICROPAK2]  74.74,84.35 0 top
U19  UHS_INVERTER_SCHMITT_TRIGGERSIP6  [SIP6_MICROPAK2]  78.74,86.87 90 top
U20  U-BLOX_ZED-F9R  [UBLOX_ZED_F9R]  73.41,98.81 0 top
U$1  [ZED#F9R21]  14.86,18.92 270 top
U$2  [L1#L26]  27.3,17.27 270 top
U$3  [ANTENNA6]  26.16,18.29 270 top
U$4  [X17]  14.48,26.42 0 top
U$5  [#GND#16]  10.79,51.31 0 top
U$6  [#GND#16]  46.1,51.18 0 top
U$7  [#GND#16]  28.45,61.34 90 top
U$8  [#GND#16]  10.79,51.31 0 bottom
U$9  [#GND#16]  46.1,51.18 0 bottom
U$10  [#D##241]  46.86,33.53 0 top
U$11  [#D##240]  46.74,30.99 0 top
U$12  [#W##244]  46.48,25.91 0 top
U$13  [#W##245]  46.61,28.32 0 top
U$14  [#3V3#17]  10.79,48.77 0 top
U$15  [#3V3#17]  46.23,46.23 0 top
U$16  [#3V3#17]  46.23,46.23 0 bottom
U$17  [#3V3#17]  10.79,48.77 0 bottom
U$18  [#5V#17]  46.61,48.77 0 top
U$19  [DEAD#RECKONING#GPS#BOARD#SILK#FINAL#JPG]  29.68,33.74 0 bottom
U$20  [DEAD#RECKONING#GPS#BOARD#SILK#FINAL#JPG]  10.22,24.84 270 top
U$21  [#5V#17]  46.61,48.77 0 bottom
U$22  [#SDA#235]  10.79,46.1 0 top
U$23  [BLK18]  26.42,64.01 0 top
U$24  [##CS##25]  46.61,43.69 0 top
U$25  [#COPI#230]  45.85,38.61 0 top
U$26  [GRN19]  43.43,64.01 0 top
U$27  [#SDA#236]  10.79,46.1 0 bottom
U$28  [#SCL#238]  10.67,43.69 0 top
U$29  [#TXR#248]  10.79,41.02 0 top
U$30  [##RST##28]  10.67,38.48 0 top
U$31  [##SFBT##26]  11.18,35.94 0 top
U$32  [X17]  14.35,26.42 0 bottom
U$33  [#INT#1]  10.54,33.53 0 top
U$34  [#INT#0]  10.54,33.53 0 bottom
U$35  [#PPS#3]  10.67,30.99 0 top
U$36  [#CIPO#232]  45.97,41.15 0 top
U$37  [#SCLK#233]  45.72,36.07 0 top
U$38  [RXI229]  34.92,61.85 90 top
U$39  [PWR6]  31.5,18.41 0 top
U$40  [RTK12]  42.93,18.41 0 top
U$41  [GEO10]  39.12,18.41 0 top
U$42  [PPS8]  35.43,18.41 0 top
U$43  [Z19]  16.76,27.94 0 top
U$44  [Z19]  16.64,27.94 0 bottom
U$45  [Y18]  18.41,30.1 0 top
U$46  [#SCL#SCLK#2244]  12.95,43.69 0 bottom
U$47  [#GEO#12]  39.12,17.53 0 bottom
U$48  [#RTK#14]  42.93,17.65 0 bottom
U$49  [Y18]  18.29,30.1 0 bottom
U$50  [TXO2234]  38.61,60.71 90 top
U$51  [#PPS#10]  35.31,17.65 0 bottom
U$52  [##CS##26]  46.61,43.69 0 bottom
U$53  [#SPI#4]  17.91,41.66 90 bottom
U$54  [#I2C#5]  18.16,47.88 90 bottom
U$55  [#RXI#CIPO#32]  44.32,41.15 0 bottom
U$56  [#TXO#COPI#33]  43.69,38.61 0 bottom
U$57  [#SCL#SCLK#2243]  43.94,36.07 0 bottom
U$58  [#D##2249]  46.86,33.53 0 bottom
U$59  [#D##2248]  46.74,30.99 0 bottom
U$60  [#W##2253]  46.61,28.32 0 bottom
U$61  [#W##2252]  46.48,25.91 0 bottom
U$62  [#TXR#2255]  10.79,41.02 0 bottom
U$63  [##RST##27]  10.67,38.35 0 bottom
U$64  [##SFBT##29]  11.18,35.94 0 bottom
U$65  [#PPS#2]  10.67,30.99 0 bottom
U$66  [#PWR#8]  31.5,17.65 0 bottom
U$67  [#GND#16]  28.45,61.34 90 bottom
U$68  [#RXI2#34]  36.07,61.21 90 bottom
U$69  [#TXO2#235]  38.61,60.71 90 bottom
U$70  [GRN19]  43.43,64.01 0 bottom
U$71  [BLK18]  26.29,64.01 0 bottom
U$72  [GPS_DEAD_RECKONING24]  29.21,45.21 0 bottom
U$73  [ZED#F9R25]  29.21,43.56 0 bottom
U$74  [#SHLD#2258]  20.57,62.48 0 bottom
U$75  [DEAD#RECKONING#GPS#BOARD#SILK#FINAL#JPG]  73.37,33.74 0 bottom
U$76  [DEAD#RECKONING#GPS#BOARD#SILK#FINAL#JPG]  53.91,24.84 270 top
U$77  [#GND#16]  54.48,51.31 0 top
U$78  [#GND#16]  89.79,51.18 0 top
U$79  [#GND#16]  72.14,61.34 90 top
U$80  [#GND#16]  54.48,51.31 0 bottom
U$81  [#GND#16]  89.79,51.18 0 bottom
U$82  [#3V3#17]  54.48,48.77 0 top
U$83  [#3V3#17]  89.92,46.23 0 top
U$84  [#3V3#17]  89.92,46.23 0 bottom
U$85  [#3V3#17]  54.48,48.77 0 bottom
U$86  [#5V#17]  90.3,48.77 0 top
U$87  [#5V#17]  90.3,48.77 0 bottom
U$88  [#SDA#235]  54.48,46.1 0 top
U$89  [#SDA#236]  54.48,46.1 0 bottom
U$90  [#SCL#238]  54.36,43.69 0 top
U$91  [#TXR#248]  54.48,41.02 0 top
U$92  [##SFBT##26]  54.86,35.94 0 top
U$93  [#PPS#3]  54.36,30.99 0 top
U$94  [#COPI#230]  89.54,38.61 0 top
U$95  [#CIPO#232]  89.66,41.15 0 top
U$96  [#SCLK#233]  89.41,36.07 0 top
U$97  [#D##241]  90.55,33.53 0 top
U$98  [#D##240]  90.42,30.99 0 top
U$99  [#W##244]  90.17,25.91 0 top
U$100  [#W##245]  90.3,28.32 0 top
U$101  [RXI229]  78.61,61.85 90 top
U$102  [BLK18]  70.1,64.01 0 top
U$103  [GRN19]  87.12,64.01 0 top
U$104  [PWR6]  75.18,18.41 0 top
U$105  [RTK12]  86.61,18.41 0 top
U$106  [GEO10]  82.8,18.41 0 top
U$107  [PPS8]  79.12,18.41 0 top
U$108  [ZED#F9R21]  58.55,18.92 270 top
U$109  [L1#L26]  70.99,17.27 270 top
U$110  [ANTENNA6]  69.85,18.29 270 top
U$111  [X17]  58.17,26.42 0 top
U$112  [X17]  58.04,26.42 0 bottom
U$113  [Z19]  60.45,27.94 0 top
U$114  [Z19]  60.32,27.94 0 bottom
U$115  [Y18]  62.1,30.1 0 top
U$116  [Y18]  61.98,30.1 0 bottom
U$117  [TXO2234]  82.3,60.71 90 top
U$118  [##RST##28]  54.36,38.48 0 top
U$119  [##CS##25]  90.3,43.69 0 top
U$120  [##CS##26]  90.3,43.69 0 bottom
U$121  [#SCL#SCLK#2243]  87.63,36.07 0 bottom
U$122  [#D##2249]  90.55,33.53 0 bottom
U$123  [#D##2248]  90.42,30.99 0 bottom
U$124  [#W##2253]  90.3,28.32 0 bottom
U$125  [#W##2252]  90.17,25.91 0 bottom
U$126  [#TXR#2255]  54.48,41.02 0 bottom
U$127  [##RST##27]  54.36,38.35 0 bottom
U$128  [##SFBT##29]  54.86,35.94 0 bottom
U$129  [#PPS#2]  54.36,30.99 0 bottom
U$130  [#SCL#SCLK#2244]  56.64,43.69 0 bottom
U$131  [#GEO#12]  82.8,17.53 0 bottom
U$132  [#RTK#14]  86.61,17.65 0 bottom
U$133  [#PPS#10]  78.99,17.65 0 bottom
U$134  [#PWR#8]  75.18,17.65 0 bottom
U$135  [#I2C#5]  61.85,47.88 90 bottom
U$136  [#SPI#4]  61.59,41.66 90 bottom
U$137  [#GND#16]  72.14,61.34 90 bottom
U$138  [#RXI2#34]  79.76,61.21 90 bottom
U$139  [#TXO2#235]  82.3,60.71 90 bottom
U$140  [GRN19]  87.12,64.01 0 bottom
U$141  [BLK18]  69.98,64.01 0 bottom
U$142  [GPS_DEAD_RECKONING24]  72.9,45.21 0 bottom
U$143  [ZED#F9R25]  72.9,43.56 0 bottom
U$144  [#SHLD#2258]  64.26,62.48 0 bottom
U$145  [#INT#1]  54.23,33.53 0 top
U$146  [#INT#0]  54.23,33.53 0 bottom
U$147  [#RXI#CIPO#32]  88.01,41.15 0 bottom
U$148  [#TXO#COPI#33]  87.38,38.61 0 bottom
U$149  [DEAD#RECKONING#GPS#BOARD#SILK#FINAL#JPG]  29.68,92.67 0 bottom
U$150  [DEAD#RECKONING#GPS#BOARD#SILK#FINAL#JPG]  10.22,83.77 270 top
U$151  [#GND#16]  10.79,110.24 0 top
U$152  [#GND#16]  46.1,110.11 0 top
U$153  [#GND#16]  28.45,120.27 90 top
U$154  [#GND#16]  10.79,110.24 0 bottom
U$155  [#GND#16]  46.1,110.11 0 bottom
U$156  [#3V3#17]  10.79,107.7 0 top
U$157  [#3V3#17]  46.23,105.16 0 top
U$158  [#3V3#17]  46.23,105.16 0 bottom
U$159  [#3V3#17]  10.79,107.7 0 bottom
U$160  [#5V#17]  46.61,107.7 0 top
U$161  [#5V#17]  46.61,107.7 0 bottom
U$162  [#SDA#235]  10.79,105.03 0 top
U$163  [#SDA#236]  10.79,105.03 0 bottom
U$164  [#SCL#238]  10.67,102.62 0 top
U$165  [#TXR#248]  10.79,99.95 0 top
U$166  [##SFBT##26]  11.18,94.87 0 top
U$167  [#PPS#3]  10.67,89.92 0 top
U$168  [#COPI#230]  45.85,97.54 0 top
U$169  [#CIPO#232]  45.97,100.08 0 top
U$170  [#SCLK#233]  45.72,95 0 top
U$171  [#D##241]  46.86,92.46 0 top
U$172  [#D##240]  46.74,89.92 0 top
U$173  [#W##244]  46.48,84.84 0 top
U$174  [#W##245]  46.61,87.25 0 top
U$175  [RXI229]  34.92,120.78 90 top
U$176  [BLK18]  26.42,122.94 0 top
U$177  [GRN19]  43.43,122.94 0 top
U$178  [PWR6]  31.5,77.34 0 top
U$179  [RTK12]  42.93,77.34 0 top
U$180  [GEO10]  39.12,77.34 0 top
U$181  [PPS8]  35.43,77.34 0 top
U$182  [ZED#F9R21]  14.86,77.85 270 top
U$183  [L1#L26]  27.3,76.2 270 top
U$184  [ANTENNA6]  26.16,77.22 270 top
U$185  [X17]  14.48,85.34 0 top
U$186  [X17]  14.35,85.34 0 bottom
U$187  [Z19]  16.76,86.87 0 top
U$188  [Z19]  16.64,86.87 0 bottom
U$189  [Y18]  18.41,89.03 0 top
U$190  [Y18]  18.29,89.03 0 bottom
U$191  [TXO2234]  38.61,119.63 90 top
U$192  [##RST##28]  10.67,97.41 0 top
U$193  [##CS##25]  46.61,102.62 0 top
U$194  [##CS##26]  46.61,102.62 0 bottom
U$195  [#SCL#SCLK#2243]  43.94,95 0 bottom
U$196  [#D##2249]  46.86,92.46 0 bottom
U$197  [#D##2248]  46.74,89.92 0 bottom
U$198  [#W##2253]  46.61,87.25 0 bottom
U$199  [#W##2252]  46.48,84.84 0 bottom
U$200  [#TXR#2255]  10.79,99.95 0 bottom
U$201  [##RST##27]  10.67,97.28 0 bottom
U$202  [##SFBT##29]  11.18,94.87 0 bottom
U$203  [#PPS#2]  10.67,89.92 0 bottom
U$204  [#SCL#SCLK#2244]  12.95,102.62 0 bottom
U$205  [#GEO#12]  39.12,76.45 0 bottom
U$206  [#RTK#14]  42.93,76.58 0 bottom
U$207  [#PPS#10]  35.31,76.58 0 bottom
U$208  [#PWR#8]  31.5,76.58 0 bottom
U$209  [#I2C#5]  18.16,106.81 90 bottom
U$210  [#SPI#4]  17.91,100.58 90 bottom
U$211  [#GND#16]  28.45,120.27 90 bottom
U$212  [#RXI2#34]  36.07,120.14 90 bottom
U$213  [#TXO2#235]  38.61,119.63 90 bottom
U$214  [GRN19]  43.43,122.94 0 bottom
U$215  [BLK18]  26.29,122.94 0 bottom
U$216  [GPS_DEAD_RECKONING24]  29.21,104.14 0 bottom
U$217  [ZED#F9R25]  29.21,102.49 0 bottom
U$218  [#SHLD#2258]  20.57,121.41 0 bottom
U$219  [#INT#1]  10.54,92.46 0 top
U$220  [#INT#0]  10.54,92.46 0 bottom
U$221  [#RXI#CIPO#32]  44.32,100.08 0 bottom
U$222  [#TXO#COPI#33]  43.69,97.54 0 bottom
U$223  [DEAD#RECKONING#GPS#BOARD#SILK#FINAL#JPG]  73.37,92.67 0 bottom
U$224  [DEAD#RECKONING#GPS#BOARD#SILK#FINAL#JPG]  53.91,83.77 270 top
U$225  [#GND#16]  54.48,110.24 0 top
U$226  [#GND#16]  89.79,110.11 0 top
U$227  [#GND#16]  72.14,120.27 90 top
U$228  [#GND#16]  54.48,110.24 0 bottom
U$229  [#GND#16]  89.79,110.11 0 bottom
U$230  [#3V3#17]  54.48,107.7 0 top
U$231  [#3V3#17]  89.92,105.16 0 top
U$232  [#3V3#17]  89.92,105.16 0 bottom
U$233  [#3V3#17]  54.48,107.7 0 bottom
U$234  [#5V#17]  90.3,107.7 0 top
U$235  [#5V#17]  90.3,107.7 0 bottom
U$236  [#SDA#235]  54.48,105.03 0 top
U$237  [#SDA#236]  54.48,105.03 0 bottom
U$238  [#SCL#238]  54.36,102.62 0 top
U$239  [#TXR#248]  54.48,99.95 0 top
U$240  [##SFBT##26]  54.86,94.87 0 top
U$241  [#PPS#3]  54.36,89.92 0 top
U$242  [#COPI#230]  89.54,97.54 0 top
U$243  [#CIPO#232]  89.66,100.08 0 top
U$244  [#SCLK#233]  89.41,95 0 top
U$245  [#D##241]  90.55,92.46 0 top
U$246  [#D##240]  90.42,89.92 0 top
U$247  [#W##244]  90.17,84.84 0 top
U$248  [#W##245]  90.3,87.25 0 top
U$249  [RXI229]  78.61,120.78 90 top
U$250  [BLK18]  70.1,122.94 0 top
U$251  [GRN19]  87.12,122.94 0 top
U$252  [PWR6]  75.18,77.34 0 top
U$253  [RTK12]  86.61,77.34 0 top
U$254  [GEO10]  82.8,77.34 0 top
U$255  [PPS8]  79.12,77.34 0 top
U$256  [ZED#F9R21]  58.55,77.85 270 top
U$257  [L1#L26]  70.99,76.2 270 top
U$258  [ANTENNA6]  69.85,77.22 270 top
U$259  [X17]  58.17,85.34 0 top
U$260  [X17]  58.04,85.34 0 bottom
U$261  [Z19]  60.45,86.87 0 top
U$262  [Z19]  60.32,86.87 0 bottom
U$263  [Y18]  62.1,89.03 0 top
U$264  [Y18]  61.98,89.03 0 bottom
U$265  [TXO2234]  82.3,119.63 90 top
U$266  [##RST##28]  54.36,97.41 0 top
U$267  [##CS##25]  90.3,102.62 0 top
U$268  [##CS##26]  90.3,102.62 0 bottom
U$269  [#SCL#SCLK#2243]  87.63,95 0 bottom
U$270  [#D##2249]  90.55,92.46 0 bottom
U$271  [#D##2248]  90.42,89.92 0 bottom
U$272  [#W##2253]  90.3,87.25 0 bottom
U$273  [#W##2252]  90.17,84.84 0 bottom
U$274  [#TXR#2255]  54.48,99.95 0 bottom
U$275  [##RST##27]  54.36,97.28 0 bottom
U$276  [##SFBT##29]  54.86,94.87 0 bottom
U$277  [#PPS#2]  54.36,89.92 0 bottom
U$278  [#SCL#SCLK#2244]  56.64,102.62 0 bottom
U$279  [#GEO#12]  82.8,76.45 0 bottom
U$280  [#RTK#14]  86.61,76.58 0 bottom
U$281  [#PPS#10]  78.99,76.58 0 bottom
U$282  [#PWR#8]  75.18,76.58 0 bottom
U$283  [#I2C#5]  61.85,106.81 90 bottom
U$284  [#SPI#4]  61.59,100.58 90 bottom
U$285  [#GND#16]  72.14,120.27 90 bottom
U$286  [#RXI2#34]  79.76,120.14 90 bottom
U$287  [#TXO2#235]  82.3,119.63 90 bottom
U$288  [GRN19]  87.12,122.94 0 bottom
U$289  [BLK18]  69.98,122.94 0 bottom
U$290  [GPS_DEAD_RECKONING24]  72.9,104.14 0 bottom
U$291  [ZED#F9R25]  72.9,102.49 0 bottom
U$292  [#SHLD#2258]  64.26,121.41 0 bottom
U$293  [#INT#1]  54.23,92.46 0 top
U$294  [#INT#0]  54.23,92.46 0 bottom
U$295  [#RXI#CIPO#32]  88.01,100.08 0 bottom
U$296  [#TXO#COPI#33]  87.38,97.54 0 bottom

## Library data of the parts
$1_25_$_2020-03-30_22-52-01-$1_25_$_2020-03-30_22-52-03 $1_25_$_2020-03-30_22-52-05 H1-H12 = SparkFun-Hardware
BT1-BT4 = SparkFun-Batteries; PROD_ID: BAT-16685
C1 C5-C7 C12 C19-C22 C24 C31-C34 C36 C43-C46 C48 = SparkFun-Capacitors; PROD_ID: CAP-14993
C2 C9 C10 C14-C16 C26-C28 C38-C40 = SparkFun-Capacitors; PROD_ID: CAP-12417
C3 C4 C17 C18 C29 C30 C41 C42 = SparkFun-Capacitors; PROD_ID: CAP-15061
C8 C13 C25 C37 = SparkFun-Capacitors; PROD_ID: CAP-15063
C11 C23 C35 C47 = SparkFun-Capacitors; PROD_ID: CAP-14232
D1 D2 D16 D17 D25 D26 D34 D35 = SparkFun-DiscreteSemi; PROD_ID: DIO-15071
D3 D12 D21 D30 = SparkFun-IC-Power; PROD_ID: DIO-14084
D4 D11 D20 D29 = SparkFun-LED; PROD_ID: DIO-00819
D5-D7 D13-D15 D22-D24 D31-D33 = SparkFun-LED; PROD_ID: DIO-08575
D8 D10 D19 D28 = SparkFun-DiscreteSemi; PROD_ID: DIO-10955
D9 D18 D27 D36 = SparkFun-DiscreteSemi; DIGIKEY_PART: PESD0402-140CT-ND; MOUSE_PART: 650-PESD0402-140; PROD_ID: DIO-15359
E1-E4 = SparkFun-RF; PROD_ID: CONN-08289
E$1-E$4 FD1-FD16 LOGO1-LOGO16 = SparkFun-Aesthetics
E$5 E$6 = SparkFun-Retired
FB1-FB4 = SparkFun-Coils; MFG_PART: BLM15HB121SN1D; PROD_ID: NDUC-14206
GEO GEO1-GEO3 I2C I2C1-I2C3 PPS PPS1-PPS3 PWR PWR1-PWR3 RTK RTK1-RTK3 SHIELD SHIELD1-SHIELD3 SPI SPI1-SPI3 = SparkFun-Jumpers
J1 J3 J4 J10 J13 J16 J19 J22 = SparkFun-Connectors; PROD_ID: CONN-13694
J2 J9 J15 J21 = SparkFun-Connectors; PROD_ID: CONN-14122
J5-J8 J11 J12 J14 J17 J18 J20 J23 J24 TP1-TP4 = SparkFun-Connectors
R1 R2 R24 R27 R39 R41 R51 R63 R65 R75 R87 R89 = SparkFun-Resistors; PROD_ID: RES-07851
R3 R36 R60 R84 = SparkFun-Resistors; PROD_ID: RES-13495
R4 R7 R43 R44 R67 R68 R91 R92 = SparkFun-Resistors; PROD_ID: RES-13860
R5 R6 R40 R42 R64 R66 R88 R90 = SparkFun-Resistors; PROD_ID: RES-07869
R8-R11 R45-R48 R69-R72 R93-R96 = SparkFun-Resistors; PROD_ID: RES-15081
R12 R13 R35 R37 R59 R61 R83 R85 = SparkFun-Resistors; PROD_ID: RES-08270
R14 R15 R29 R30 R53 R54 R77 R78 = SparkFun-Resistors; PROD_ID: RES-14340
R16 R23 R25 R26 R49 R50 R73 R74 = SparkFun-Resistors; PROD_ID: RES-14341
R17 R28 R52 R76 = SparkFun-Resistors; PROD_ID: RES-14342
R18-R20 R33 R34 R38 R57 R58 R62 R81 R82 R86 = SparkFun-Resistors; PROD_ID: RES-08272
R21 R22 R31 R32 R55 R56 R79 R80 = SparkFun-Resistors; PROD_ID: RES-09334
U1 U7 U12 U17 = SparkFun-DiscreteSemi; PROD_ID: IC-15070
U2 U5 U11 U16 = SparkFun-IC-Power; PROD_ID: VREG-12457
U3 U4 U8 U9 U13 U14 U18 U19 = SparkFun-IC-Amplifiers; PROD_ID: IC-17000
U6 U10 U15 U20 = SparkFun-GPS; PROD_ID: IC-14716
U$1-U$18 U$21-U$74 U$77-U$148 U$151-U$222 U$225-U$296 = top
U$19 U$75 U$149 U$223 = Dead#Reckoning#GPS#board#silk#FINAL#png
U$20 U$76 U$150 U$224 = Dead#Reckoning#GPS#board#silk#FINALSMALL

## Nets
3.3V: C1.1 C2.1 C5.1 C6.1 C7.1 C10.1 C12.1 D4.A D6.A D8.A I2C.2 J3.2 J4.2 J5.3 J6.8 R3.2 R4.2 R7.2 U1.8 U3.P6 U4.P6 U5.5 U6.P33 U6.P34 U6.P38
3.3V1: C15.1 C16.1 C19.1 C20.1 C21.1 C22.1 C24.1 D10.A D11.A D14.A I2C1.2 J1.2 J8.3 J10.2 J12.8 R36.2 R43.2 R44.2 U2.5 U7.8 U8.P6 U9.P6 U10.P33 U10.P34 U10.P38
3.3V2: C27.1 C28.1 C31.1 C32.1 C33.1 C34.1 C36.1 D19.A D20.A D23.A I2C2.2 J13.2 J14.3 J16.2 J18.8 R60.2 R67.2 R68.2 U11.5 U12.8 U13.P6 U14.P6 U15.P33 U15.P34 U15.P38
3.3V3: C39.1 C40.1 C43.1 C44.1 C45.1 C46.1 C48.1 D28.A D29.A D32.A I2C3.2 J19.2 J20.3 J22.2 J24.8 R84.2 R91.2 R92.2 U16.5 U17.8 U18.P6 U19.P6 U20.P33 U20.P34 U20.P38
!RESET: J6.4 R8.P2
!RESET1: J12.4 R46.P2
!RESET2: J18.4 R70.P2
!RESET3: J24.4 R94.P2
!SAFEBOOT: J6.3 R8.P3
!SAFEBOOT1: J12.3 R46.P3
!SAFEBOOT2: J18.3 R70.P3
!SAFEBOOT3: J24.3 R94.P3
D_SEL: SPI.1 U6.P47
D_SEL1: SPI1.1 U10.P47
D_SEL2: SPI2.1 U15.P47
D_SEL3: SPI3.1 U20.P47
DIR+: J5.9 R1.1
DIR+1: J8.9 R41.1
DIR+2: J14.9 R65.1
DIR+3: J20.9 R89.1
DIR_IN: R5.2 U1.4
DIR_IN1: R42.2 U7.4
DIR_IN2: R66.2 U12.4
DIR_IN3: R90.2 U17.4
DIR_INV: R4.1 U1.6 U4.P2
DIR_INV1: R44.1 U7.6 U9.P2
DIR_INV2: R68.1 U12.6 U14.P2
DIR_INV3: R92.1 U17.6 U19.P2
DIR_OUT: R10.P6 U4.P4
DIR_OUT1: R47.P6 U9.P4
DIR_OUT2: R71.P6 U14.P4
DIR_OUT3: R95.P6 U19.P4
DMINUS: R21.2 U6.P39
DMINUS1: R31.2 U10.P39
DMINUS2: R55.2 U15.P39
DMINUS3: R79.2 U20.P39
DPLUS: R22.2 U6.P40
DPLUS1: R32.2 U10.P40
DPLUS2: R56.2 U15.P40
DPLUS3: R80.2 U20.P40
GEOF_STAT: D7.A R11.P7
GEOF_STAT1: D15.A R48.P7
GEOF_STAT2: D24.A R72.P7
GEOF_STAT3: D33.A R96.P7
GND: BT2.- C1.2 C2.2 C3.2 C4.2 C5.2 C6.2 C7.2 C8.2 C9.2 C10.2 C11.2 C12.2 D1.1 D2.1 D3.2 D9.1 E1.GND@0 E1.GND@1 E1.GND@2 E1.GND@3 GEO.1 J2.GND J2.GND2 J3.1 J4.1 J5.1 J5.8 J5.10 J6.9 J7.6 PPS.1 PWR.1 R3.1 R14.1 R15.1 SHIELD.1 SPI.2 U1.2 U1.3 U1.5 U3.P3 U4.P3 U5.2 U6.G1 U6.G2 U6.G3 U6.G4 U6.G5 U6.G6 U6.G7 U6.G8 U6.G9 U6.G10 U6.G11 U6.G12 U6.G13 U6.G14 U6.G15 U6.G16 U6.G17 U6.G18 U6.G19 U6.G20 U6.G21 U6.G22 U6.G23 U6.G24 U6.G25 U6.G26 U6.G27 U6.G28 U6.G29 U6.G30 U6.G31 U6.G32 U6.G33 U6.G34 U6.G35 U6.G36 U6.G37 U6.G38 U6.G39 U6.G40 U6.G41 U6.G42 U6.G43 U6.G44 U6.G45 U6.G46 U6.G47 U6.G48 U6.P1 U6.P3 U6.P12 U6.P14 U6.P32 U6.P37 U6.P41 U6.P48
GND1: BT1.- C13.2 C14.2 C15.2 C16.2 C17.2 C18.2 C19.2 C20.2 C21.2 C22.2 C23.2 C24.2 D12.2 D16.1 D17.1 D18.1 E2.GND@0 E2.GND@1 E2.GND@2 E2.GND@3 GEO1.1 J1.1 J8.1 J8.8 J8.10 J9.GND J9.GND2 J10.1 J11.6 J12.9 PPS1.1 PWR1.1 R29.1 R30.1 R36.1 SHIELD1.1 SPI1.2 U2.2 U7.2 U7.3 U7.5 U8.P3 U9.P3 U10.G1 U10.G2 U10.G3 U10.G4 U10.G5 U10.G6 U10.G7 U10.G8 U10.G9 U10.G10 U10.G11 U10.G12 U10.G13 U10.G14 U10.G15 U10.G16 U10.G17 U10.G18 U10.G19 U10.G20 U10.G21 U10.G22 U10.G23 U10.G24 U10.G25 U10.G26 U10.G27 U10.G28 U10.G29 U10.G30 U10.G31 U10.G32 U10.G33 U10.G34 U10.G35 U10.G36 U10.G37 U10.G38 U10.G39 U10.G40 U10.G41 U10.G42 U10.G43 U10.G44 U10.G45 U10.G46 U10.G47 U10.G48 U10.P1 U10.P3 U10.P12 U10.P14 U10.P32 U10.P37 U10.P41 U10.P48
GND2: BT3.- C25.2 C26.2 C27.2 C28.2 C29.2 C30.2 C31.2 C32.2 C33.2 C34.2 C35.2 C36.2 D21.2 D25.1 D26.1 D27.1 E3.GND@0 E3.GND@1 E3.GND@2 E3.GND@3 GEO2.1 J13.1 J14.1 J14.8 J14.10 J15.GND J15.GND2 J16.1 J17.6 J18.9 PPS2.1 PWR2.1 R53.1 R54.1 R60.1 SHIELD2.1 SPI2.2 U11.2 U12.2 U12.3 U12.5 U13.P3 U14.P3 U15.G1 U15.G2 U15.G3 U15.G4 U15.G5 U15.G6 U15.G7 U15.G8 U15.G9 U15.G10 U15.G11 U15.G12 U15.G13 U15.G14 U15.G15 U15.G16 U15.G17 U15.G18 U15.G19 U15.G20 U15.G21 U15.G22 U15.G23 U15.G24 U15.G25 U15.G26 U15.G27 U15.G28 U15.G29 U15.G30 U15.G31 U15.G32 U15.G33 U15.G34 U15.G35 U15.G36 U15.G37 U15.G38 U15.G39 U15.G40 U15.G41 U15.G42 U15.G43 U15.G44 U15.G45 U15.G46 U15.G47 U15.G48 U15.P1 U15.P3 U15.P12 U15.P14 U15.P32 U15.P37 U15.P41 U15.P48
GND3: BT4.- C37.2 C38.2 C39.2 C40.2 C41.2 C42.2 C43.2 C44.2 C45.2 C46.2 C47.2 C48.2 D30.2 D34.1 D35.1 D36.1 E4.GND@0 E4.GND@1 E4.GND@2 E4.GND@3 GEO3.1 J19.1 J20.1 J20.8 J20.10 J21.GND J21.GND2 J22.1 J23.6 J24.9 PPS3.1 PWR3.1 R77.1 R78.1 R84.1 SHIELD3.1 SPI3.2 U16.2 U17.2 U17.3 U17.5 U18.P3 U19.P3 U20.G1 U20.G2 U20.G3 U20.G4 U20.G5 U20.G6 U20.G7 U20.G8 U20.G9 U20.G10 U20.G11 U20.G12 U20.G13 U20.G14 U20.G15 U20.G16 U20.G17 U20.G18 U20.G19 U20.G20 U20.G21 U20.G22 U20.G23 U20.G24 U20.G25 U20.G26 U20.G27 U20.G28 U20.G29 U20.G30 U20.G31 U20.G32 U20.G33 U20.G34 U20.G35 U20.G36 U20.G37 U20.G38 U20.G39 U20.G40 U20.G41 U20.G42 U20.G43 U20.G44 U20.G45 U20.G46 U20.G47 U20.G48 U20.P1 U20.P3 U20.P12 U20.P14 U20.P32 U20.P37 U20.P41 U20.P48
INT: J6.2 R8.P4
INT1: J12.2 R46.P4
INT2: J18.2 R70.P4
INT3: J24.2 R94.P4
N$1: I2C.1 R23.2
N$2: D8.C R24.2
N$3: I2C.3 R16.2
N$4: D4.C R17.2
N$5: C8.1 FB1.2 R13.1
N$6: D3.3 J2.A6 J2.B6
N$7: D3.1 J2.A7 J2.B7
N$8: PWR.2 R17.1
N$9: D3.6 R21.1
N$10: D3.4 R22.1
N$11: R8.P7 U6.P49
N$12: R8.P5 U6.P51
N$13: D10.C R27.2
N$14: J2.B5 R14.2
N$15: J2.A5 R15.2
N$16: R9.P6 U6.P44
N$17: R9.P5 U6.P45
N$18: R8.P8 U6.P46
N$19: R9.P8 U6.P42
N$20: R9.P7 U6.P43
N$21: R10.P1 U6.P27
N$22: R19.1 RTK.2
N$23: PPS.2 R18.1
N$24: D5.C R18.2
N$25: D6.C R19.2
N$26: R10.P2 U6.P26
N$27: R11.P2 U6.P19
N$28: R11.P1 U6.P20
N$29: R12.1 U6.P53
N$30: R8.P6 U6.P50
N$31: R10.P4 U6.P22
N$32: R10.P3 U6.P23
N$33: GEO.2 R20.1
N$34: D7.C R20.2
N$35: C4.1 D2.3 R2.2 R6.1
N$36: I2C1.1 R25.2
N$37: C3.1 D1.3 R1.2 R5.1
N$38: I2C1.3 R26.2
N$39: J9.B5 R29.2
N$40: J9.A5 R30.2
N$41: R34.1 RTK1.2
N$42: PPS1.2 R33.1
N$43: D13.C R33.2
N$44: D14.C R34.2
N$45: D11.C R28.2
N$46: PWR1.2 R28.1
N$47: C13.1 FB2.2 R35.1
N$48: D12.3 J9.A6 J9.B6
N$49: D12.1 J9.A7 J9.B7
N$50: D12.6 R31.1
N$51: D12.4 R32.1
N$52: R46.P7 U10.P49
N$53: R46.P5 U10.P51
N$54: R45.P6 U10.P44
N$55: R45.P5 U10.P45
N$56: R46.P8 U10.P46
N$57: R45.P8 U10.P42
N$58: R45.P7 U10.P43
N$59: R47.P1 U10.P27
N$60: R47.P2 U10.P26
N$61: R48.P2 U10.P19
N$62: R48.P1 U10.P20
N$63: R37.1 U10.P53
N$64: R46.P6 U10.P50
N$65: R47.P4 U10.P22
N$66: R47.P3 U10.P23
N$67: GEO1.2 R38.1
N$68: D15.C R38.2
N$69: C18.1 D16.3 R39.2 R40.1
N$70: C17.1 D17.3 R41.2 R42.1
N$71: D19.C R51.2
N$72: I2C2.1 R49.2
N$73: I2C2.3 R50.2
N$74: J15.B5 R53.2
N$75: J15.A5 R54.2
N$76: R58.1 RTK2.2
N$77: PPS2.2 R57.1
N$78: D22.C R57.2
N$79: D23.C R58.2
N$80: D20.C R52.2
N$81: PWR2.2 R52.1
N$82: C25.1 FB3.2 R59.1
N$83: D21.3 J15.A6 J15.B6
N$84: D21.1 J15.A7 J15.B7
N$85: D21.6 R55.1
N$86: D21.4 R56.1
N$87: R70.P7 U15.P49
N$88: R70.P5 U15.P51
N$89: R69.P6 U15.P44
N$90: R69.P5 U15.P45
N$91: R70.P8 U15.P46
N$92: R69.P8 U15.P42
N$93: R69.P7 U15.P43
N$94: R71.P1 U15.P27
N$95: R71.P2 U15.P26
N$96: R72.P2 U15.P19
N$97: R72.P1 U15.P20
N$98: R61.1 U15.P53
N$99: R70.P6 U15.P50
N$100: R71.P4 U15.P22
N$101: R71.P3 U15.P23
N$102: GEO2.2 R62.1
N$103: D24.C R62.2
N$104: C30.1 D25.3 R63.2 R64.1
N$105: C29.1 D26.3 R65.2 R66.1
N$106: D28.C R75.2
N$107: I2C3.1 R73.2
N$108: I2C3.3 R74.2
N$109: J21.B5 R77.2
N$110: J21.A5 R78.2
N$111: R82.1 RTK3.2
N$112: PPS3.2 R81.1
N$113: D31.C R81.2
N$114: D32.C R82.2
N$115: D29.C R76.2
N$116: PWR3.2 R76.1
N$117: C37.1 FB4.2 R83.1
N$118: D30.3 J21.A6 J21.B6
N$119: D30.1 J21.A7 J21.B7
N$120: D30.6 R79.1
N$121: D30.4 R80.1
N$122: R94.P7 U20.P49
N$123: R94.P5 U20.P51
N$124: R93.P6 U20.P44
N$125: R93.P5 U20.P45
N$126: R94.P8 U20.P46
N$127: R93.P8 U20.P42
N$128: R93.P7 U20.P43
N$129: R95.P1 U20.P27
N$130: R95.P2 U20.P26
N$131: R96.P2 U20.P19
N$132: R96.P1 U20.P20
N$133: R85.1 U20.P53
N$134: R94.P6 U20.P50
N$135: R95.P4 U20.P22
N$136: R95.P3 U20.P23
N$137: GEO3.2 R86.1
N$138: D33.C R86.2
N$139: C42.1 D34.3 R87.2 R88.1
N$140: C41.1 D35.3 R89.2 R90.1
PPS: D5.A J6.1 R12.2
PPS1: D13.A J12.1 R37.2
PPS2: D22.A J18.1 R61.2
PPS3: D31.A J24.1 R85.2
RF_IN [Antenna]: D9.2 E1.SIG FB1.1 U6.P2
RF_IN1 [Antenna]: D18.2 E2.SIG FB2.1 U10.P2
RF_IN2 [Antenna]: D27.2 E3.SIG FB3.1 U15.P2
RF_IN3 [Antenna]: D36.2 E4.SIG FB4.1 U20.P2
RTK_STAT: R11.P8 RTK.1
RTK_STAT1: R48.P8 RTK1.1
RTK_STAT2: R72.P8 RTK2.1
RTK_STAT3: R96.P8 RTK3.1
RXI1: J11.3 R47.P7
RXI2: J7.3 R10.P7
RXI3: J17.3 R71.P7
RXI4: J23.3 R95.P7
RXI/CIPO: J5.5 R9.P2
RXI/CIPO1: J8.5 R45.P2
RXI/CIPO2: J14.5 R69.P2
RXI/CIPO3: J20.5 R93.P2
SCL/CLK: J3.4 J4.4 J5.7 J6.6 R9.P4 R16.1
SCL/CLK1: J1.4 J8.7 J10.4 J12.6 R26.1 R45.P4
SCL/CLK2: J13.4 J14.7 J16.4 J18.6 R50.1 R69.P4
SCL/CLK3: J19.4 J20.7 J22.4 J24.6 R74.1 R93.P4
SDA/!CS: J3.3 J4.3 J5.4 J6.7 R9.P3 R23.1
SDA/!CS1: J1.3 J8.4 J10.3 J12.7 R25.1 R45.P3
SDA/!CS2: J13.3 J14.4 J16.3 J18.7 R49.1 R69.P3
SDA/!CS3: J19.3 J20.4 J22.3 J24.7 R73.1 R93.P3
SHIELD: J2.SHLD1 J2.SHLD2 J2.SHLD3 J2.SHLD4 SHIELD.2
SHIELD1: J9.SHLD1 J9.SHLD2 J9.SHLD3 J9.SHLD4 SHIELD1.2
SHIELD2: J15.SHLD1 J15.SHLD2 J15.SHLD3 J15.SHLD4 SHIELD2.2
SHIELD3: J21.SHLD1 J21.SHLD2 J21.SHLD3 J21.SHLD4 SHIELD3.2
TX_READY: J6.5 R8.P1
TX_READY1: J12.5 R46.P1
TX_READY2: J18.5 R70.P1
TX_READY3: J24.5 R94.P1
TXO1: J11.2 R47.P8
TXO2: J7.2 R10.P8
TXO3: J17.2 R71.P8
TXO4: J23.2 R95.P8
TXO/COPI: J5.6 R9.P1
TXO/COPI1: J8.6 R45.P1
TXO/COPI2: J14.6 R69.P1
TXO/COPI3: J20.6 R93.P1
V_BATT: BT2.+ C11.1 R24.1 TP1.1 U6.P36
V_BATT1: BT1.+ C23.1 R27.1 TP2.1 U10.P36
V_BATT2: BT3.+ C35.1 R51.1 TP3.1 U15.P36
V_BATT3: BT4.+ C47.1 R75.1 TP4.1 U20.P36
V_RF: R13.2 U6.P7
V_RF1: R35.2 U10.P7
V_RF2: R59.2 U15.P7
V_RF3: R83.2 U20.P7
VIN: C9.1 D3.5 J2.VBUS1 J2.VBUS2 J5.2 U5.1 U5.3
VIN1: C14.1 D12.5 J8.2 J9.VBUS1 J9.VBUS2 U2.1 U2.3
VIN2: C26.1 D21.5 J14.2 J15.VBUS1 J15.VBUS2 U11.1 U11.3
VIN3: C38.1 D30.5 J20.2 J21.VBUS1 J21.VBUS2 U16.1 U16.3
WT+: J5.11 R2.1
WT+1: J8.11 R39.1
WT+2: J14.11 R63.1
WT+3: J20.11 R87.1
WT_IN: R6.2 U1.1
WT_IN1: R40.2 U7.1
WT_IN2: R64.2 U12.1
WT_IN3: R88.2 U17.1
WT_INV: R7.1 U1.7 U3.P2
WT_INV1: R43.1 U7.7 U8.P2
WT_INV2: R67.1 U12.7 U13.P2
WT_INV3: R91.1 U17.7 U18.P2
WT_OUT: R10.P5 U3.P4
WT_OUT1: R47.P5 U8.P4
WT_OUT2: R71.P5 U13.P4
WT_OUT3: R95.P5 U18.P4

## Tracks (layer width: path | path; a pad name or v marks a point on that pad's centre or on a via)
3.3V  (via drill 0.3, 0.35)
  Top 0.152: U3.P6 30.7,25.91 | 30.7,26.34 30.7,25.91 | 30.35,25.91 30.7,25.91
  Top 0.254: R4.2 36.45,29.01 v36.12,29.34 | R7.2 31.64,20.24 | U1.8 33.9,21.73 33.9,20.21 C1.1 | v38.61,50.04 38.61,48.77 v39.62,47.75 | v32.38,27.43 32.39,27.44 C6.1 34.05,27.44 34.19,27.58 U4.P6 | D4.A 30.11,19.7 v30.61,20.19 30.65,20.24 31.64,20.24 | 31.64,20.24 33.87,20.24 C1.1 | D6.A 41.02,17.92 v41.02,18.29 | v41.02,19.56 34.55,19.56 C1.1 | C7.1 29.36,25.91 30.35,25.91 30.64,25.91 U3.P6 30.7,26.34 30.7,26.79 v30.56,26.92 | U6.P38 25.91,49.01 C12.1 25.92,49.99 25.91,50 | C5.1 25.89,51.11 R3.2
  Top 0.381: J4.2 v46.1,55.88 | v13.34,56.9 J3.2 | J5.3 47.88,46.23 47.24,46.86 47.24,49.02 v44.64,51.63 | 33.02,51.41 U5.5 31.38,51.35 v31.38,50.04 C2.1 31.38,48.51 | 33.02,51.41 34.83,51.41 D8.A | C10.1 33.02,51.41 | 25.91,50 C5.1 25.87,50.04 v25.02,50.04 | U6.P34 30.31,48.21 30.61,48.51 31.38,48.51 | U6.P33 31.38,47.24 31.38,48.51
  Bottom 0.254: I2C.2 18.54,47.75 19.18,48.39 19.18,50.04 | v30.61,20.19 30.61,26.87 v30.56,26.92 31.06,27.43 v32.38,27.43 34.21,27.43 v36.12,29.34 36.12,30.13 37.11,31.12 38.23,31.12 40.45,33.34 40.45,46.93 v39.62,47.75 | v41.02,19.56 v41.02,18.29
  Bottom 0.381: v46.1,55.88 46.1,53.09 v44.64,51.63 43.05,50.04 v38.61,50.04 v31.38,50.04 v25.02,50.04 19.18,50.04 15.68,50.04 13.94,51.78 | v13.34,56.9 13.46,56.9 13.91,56.45 13.91,51.82 13.94,51.78 | J6.8 10.92,48.77 13.94,51.78
3.3V1  (via drill 0.3, 0.35)
  Top 0.152: U8.P6 74.38,25.91 | 74.38,26.34 74.38,25.91 | 74.04,25.91 74.38,25.91
  Top 0.254: R44.2 80.14,29.01 v79.81,29.34 | R43.2 75.33,20.24 | U7.8 77.59,21.73 77.59,20.21 C19.1 | v82.3,50.04 82.3,48.77 v83.31,47.75 | v76.07,27.43 76.08,27.44 C20.1 77.74,27.44 77.88,27.58 U9.P6 | D11.A 73.8,19.7 v74.3,20.19 74.34,20.24 75.33,20.24 | 75.33,20.24 77.56,20.24 C19.1 | D14.A 84.71,17.92 v84.71,18.29 | v84.71,19.56 78.24,19.56 C19.1 | C21.1 73.05,25.91 74.04,25.91 74.32,25.91 U8.P6 74.38,26.34 74.38,26.79 v74.24,26.92 | U10.P38 69.59,49.01 C24.1 69.6,49.99 69.59,50 | C22.1 69.58,51.11 R36.2
  Top 0.381: J10.2 v89.79,55.88 | v57.02,56.9 J1.2 | J8.3 91.57,46.23 90.93,46.86 90.93,49.02 v88.33,51.63 | 76.71,51.41 U2.5 75.06,51.35 v75.06,50.04 C16.1 75.06,48.51 | 76.71,51.41 78.51,51.41 D10.A | C15.1 76.71,51.41 | 69.59,50 C22.1 69.55,50.04 v68.71,50.04 | U10.P34 73.99,48.21 74.3,48.51 75.06,48.51 | U10.P33 75.06,47.24 75.06,48.51
  Bottom 0.254: I2C1.2 62.23,47.75 62.86,48.39 62.86,50.04 | v74.3,20.19 74.3,26.87 v74.24,26.92 74.75,27.43 v76.07,27.43 77.9,27.43 v79.81,29.34 79.81,30.13 80.8,31.12 81.92,31.12 84.14,33.34 84.14,46.93 v83.31,47.75 | v84.71,19.56 v84.71,18.29
  Bottom 0.381: v89.79,55.88 89.79,53.09 v88.33,51.63 86.74,50.04 v82.3,50.04 v75.06,50.04 v68.71,50.04 62.86,50.04 59.37,50.04 57.63,51.78 | v57.02,56.9 57.15,56.9 57.59,56.45 57.59,51.82 57.63,51.78 | J12.8 54.61,48.77 57.63,51.78
3.3V2  (via drill 0.3, 0.35)
  Top 0.152: U13.P6 30.7,84.84 | 30.7,85.27 30.7,84.84 | 30.35,84.84 30.7,84.84
  Top 0.254: R68.2 36.45,87.94 v36.12,88.27 | R67.2 31.64,79.16 | U12.8 33.9,80.66 33.9,79.14 C31.1 | v38.61,108.97 38.61,107.7 v39.62,106.68 | v32.38,86.36 v32.39,86.37 C32.1 34.05,86.37 34.19,86.51 U14.P6 | D20.A 30.11,78.62 v30.61,79.12 30.65,79.16 31.64,79.16 | 31.64,79.16 33.87,79.16 C31.1 | D23.A 41.02,76.85 v41.02,77.22 | v41.02,78.49 34.55,78.49 C31.1 | C33.1 29.36,84.84 30.35,84.84 30.64,84.84 U13.P6 30.7,85.27 30.7,85.71 v30.56,85.85 | U15.P38 25.91,107.94 C36.1 25.92,108.91 25.91,108.92 | C34.1 25.89,110.04 R60.2
  Top 0.381: J16.2 v46.1,114.81 | v13.34,115.82 J13.2 | J14.3 47.88,105.16 47.24,105.79 47.24,107.95 v44.64,110.55 | 33.02,110.33 U11.5 31.38,110.28 v31.38,108.97 C28.1 31.38,107.44 | 33.02,110.33 34.83,110.33 D19.A | C27.1 33.02,110.33 | 25.91,108.92 C34.1 25.87,108.97 v25.02,108.97 | U15.P34 30.31,107.14 30.61,107.44 31.38,107.44 | U15.P33 31.38,106.16 31.38,107.44
  Bottom 0.254: I2C2.2 18.54,106.68 19.18,107.31 19.18,108.97 | v30.61,79.12 30.61,85.8 v30.56,85.85 31.06,86.36 v32.38,86.36 34.21,86.36 v36.12,88.27 36.12,89.06 37.11,90.05 38.23,90.05 40.45,92.26 40.45,105.86 v39.62,106.68 | v41.02,78.49 v41.02,77.22